# Altium PCB SoM BaseBoard Limbotics Prototype V0PcbDoc.PcbDoc
Units mm, origin at the board's own origin, x right, y up, seen from the top; angles counter-clockwise.
Board outline 85 x 56 mm, 2 copper layers (Top Layer, Bottom Layer); 82 components, 172 nets, 567 pads, 0 vias.
Unrouted connection lines stored in the file: 296.
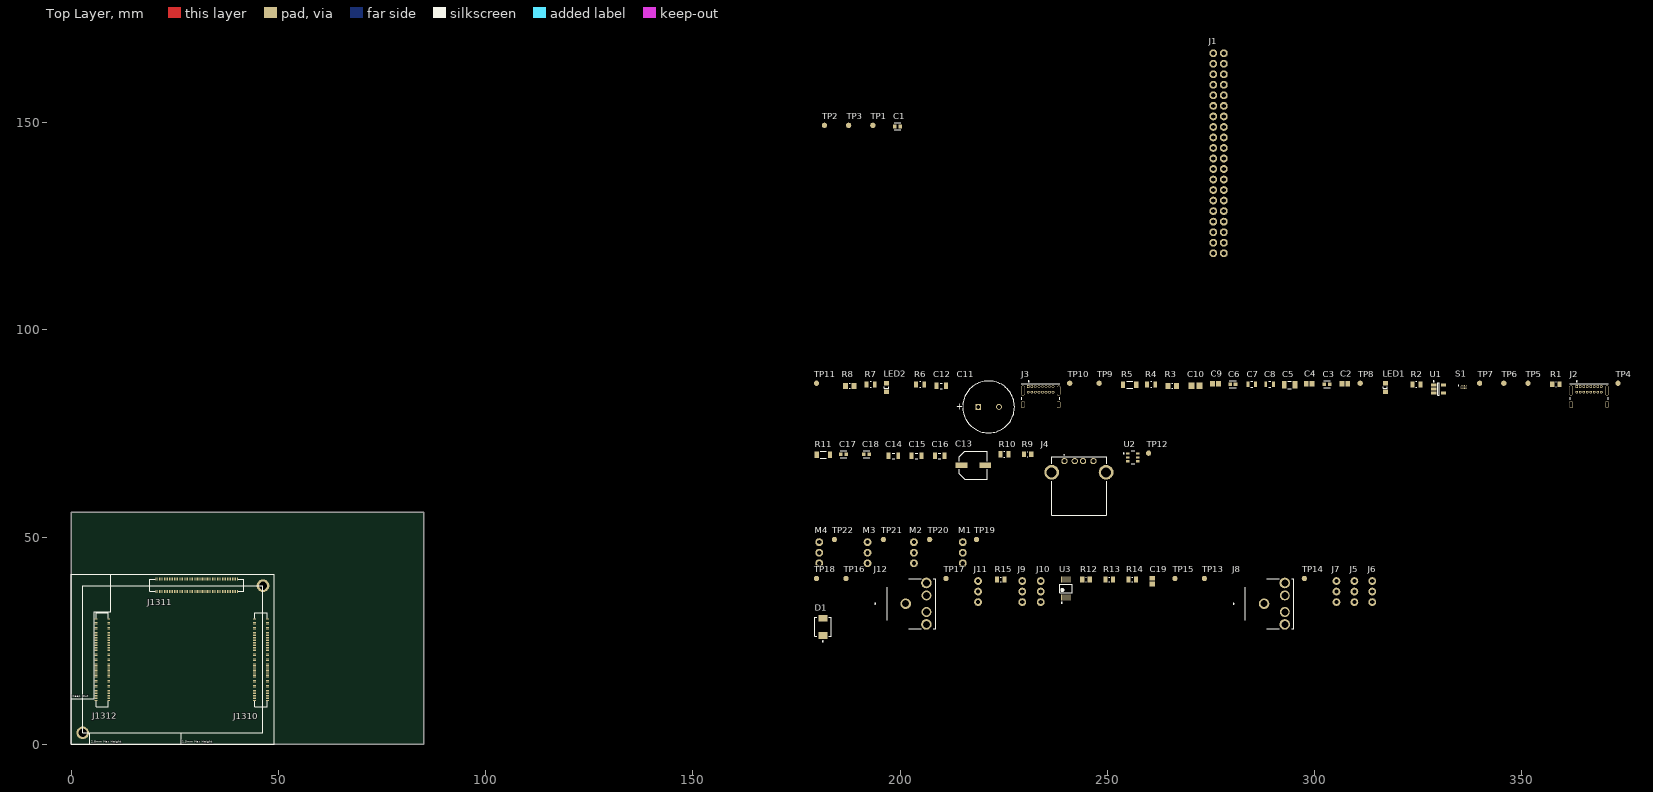
[diagram p0: Top Layer view]
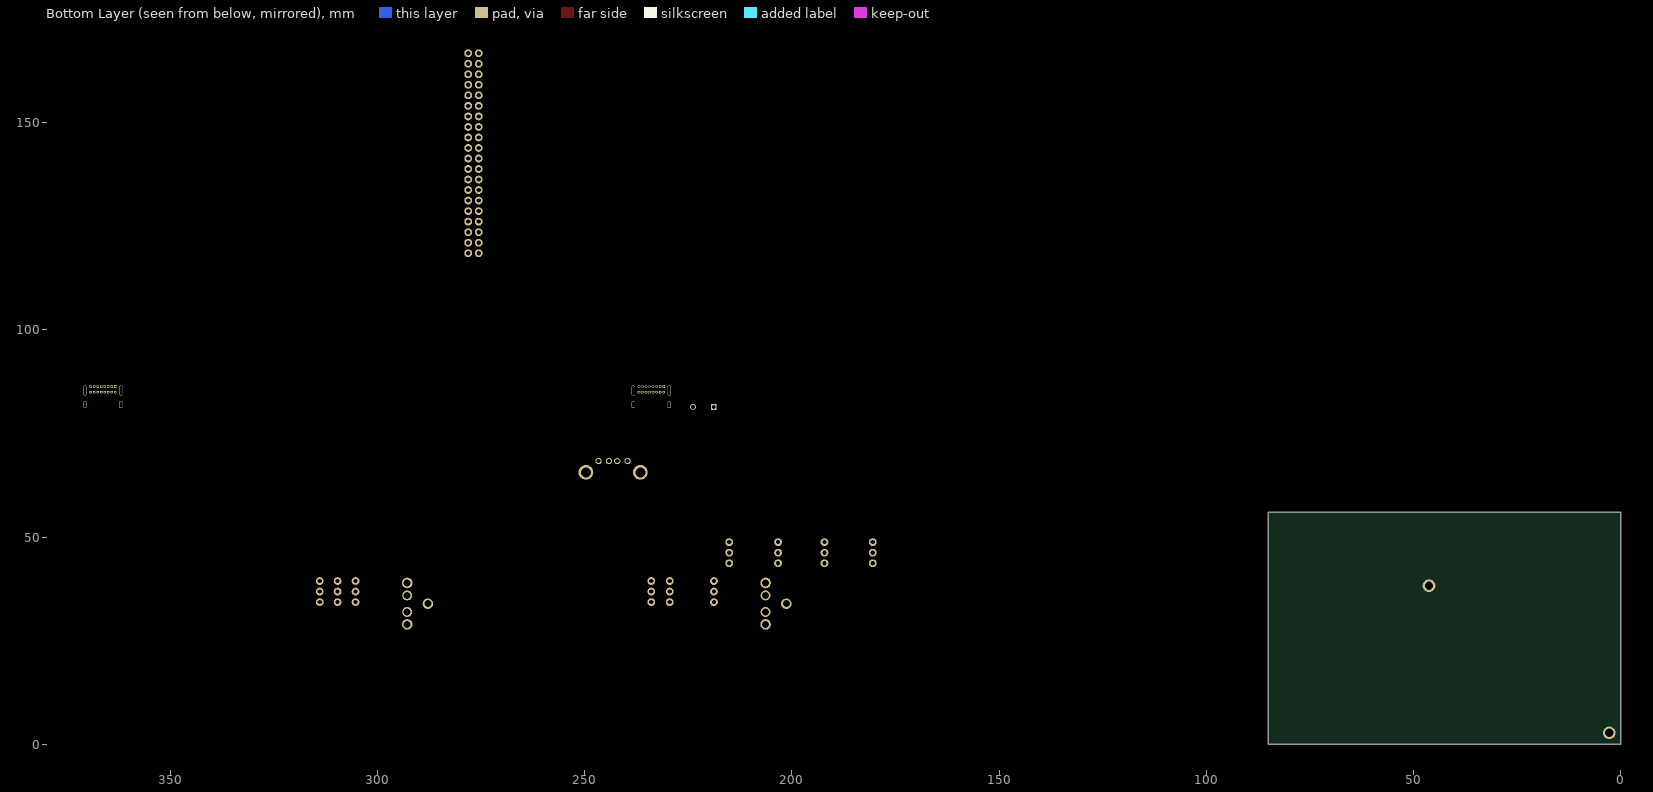
[diagram p1: Bottom Layer view, seen from below]

## Layer stack, top to bottom
Top Solder: solder mask 0.0102, Solder Resist, Dk 3.5
Top Layer: signal copper 0.0356
Dielectric 1: dielectric 0.32, FR-4, Dk 4.8
Bottom Layer: signal copper 0.0356
Bottom Solder: solder mask 0.0102, Solder Resist, Dk 3.5

## Board outline
0,0 85,0 85,56 0,56

## Design rules (kind name [scope] priority, off if disabled: settings)
Clearance [All] p1: gap=0.254 ignorepadtopadclearanceinfootprint=TRUE except(0: Arc-Hole Track-Hole SMDPad-Hole THPad-Hole Via-Hole Fill-Hole Poly-Hole Region-Hole Text-Hole; 0.2: Arc-Arc Arc-Track Track-Track)
PolygonConnect [All] p1: connectstyle=Relief reliefconductorwidth=0.254 reliefentries=4 polygonreliefangle="90 Angle" airgapwidth=0.254
RoutingVias [All] p1: holewidth=0.711 width=1.27 viastyle="Through Hole" minholewidth=0.711 minwidth=1.27 maxholewidth=0.711 maxwidth=1.27
SolderMaskExpansion [All] p1: expansion=0.102 istentingtop=FALSE
Width [All] p1: maxlimit=0.762 minlimit=0.127 preferedwidth=0.178
30 further rules are at their usual default settings.

## Classes and differential pairs
component class SoM: C1 J1 J1310 J1311 J1312 TP1 TP2 TP3
component class Power: C2 C3 C4 C5 C6 C7 C8 C9 C10 C11 C12 D1 J2 J3 LED1 LED2 R1 R2 R3 R4 R5 R6 R7 R8 S1 TP4 TP5 TP6 TP7 TP8 TP9 TP10 TP11 U1
component class "Peripherals - USB": C13 C14 C15 C16 C17 C18 J4 R9 R10 R11 TP12 U2
component class "Peripherals - Servos": M1 M2 M3 M4 TP19 TP20 TP21 TP22
component class "Peripherals - MyoSensor": C19 J5 J6 J7 J8 J9 J10 J11 J12 R12 R13 R14 R15 TP13 TP14 TP15 TP16 TP17 TP18 U3

## Components (designator, comment, footprint, x,y, rotation, side; value= is the part's Value field where it differs from the comment)
C1 "0.1uF" FP-C0603-CJ-MFG 199.39,149.098 r0 top value=100nF
C2 "1uF" CAPC2013X145X50LL20T25 307.34,86.995 r0 top
C3 "0.1uF" FP-C0603-CJ-MFG 303.022,86.868 r0 top value=100nF
C4 "1uF" CAPC2013X145X50LL20T25 298.704,86.995 r0 top
C5 "47uF" FP-GRM31C-0_2-e0_3_0_8-IPC_C 294.005,86.741 r0 top
C6 "0.1uF" FP-C0603-CJ-MFG 280.289,86.868 r0 top value=100nF
C7 "22uF" FP-GRM21B-0_15-MFG 284.861,86.868 r0 top
C8 "22uF" FP-GRM21B-0_15-MFG 289.179,86.868 r0 top
C9 "33nF" CAPC2013X94X50LL20T25 276.098,86.995 r0 top
C10 "2.2uF" CAPC2013X135X50ML10T20 271.272,86.487 r0 top
C11 "100uF * n" CAPPR65-500-2000X1250X2200 221.361,81.407 r0 top
C12 "10uF" CAPC2013X145X20ML20 209.931,86.487 r0 top
C13 "100uF" PNSC-EEEFK1C101P_L 217.678,67.31 r0 top
C14 "10uF" CAPC2013X145X20ML20 198.374,69.596 r0 top
C15 "10uF" CAPC2013X145X20ML20 203.962,69.596 r0 top
C16 "10uF" CAPC2013X145X20ML20 209.55,69.596 r0 top
C17 "0.1uF" FP-C0603-CJ-MFG 186.309,69.977 r0 top value=100nF
C18 "0.1uF" FP-C0603-CJ-MFG 191.897,69.977 r0 top value=100nF
C19 "1uF" CAPC2013X145X50LL20T25 260.858,39.37 r90 top
D1 "SMBJ5.0A-TR" FP-SMB-MFG 181.356,28.321 r90 top
J1 "210-P92-20GBEG" 2X20 278.13,118.491 r90 top
J2 "USB4085-GF-A" FP-USB4085-GF-A-MFG 366.268,82.296 r0 top
J3 "USB4085-GF-A" FP-USB4085-GF-A-MFG 233.934,82.296 r0 top
J4 "87520-0010BLF" 875200010BLF 239.649,68.326 r0 top
J5 "0.1 1x3 Header" 1X03 309.626,34.29 r90 top
J6 "0.1 1x3 Header" 1X03 313.944,34.29 r90 top
J7 "0.1 1x3 Header" 1X03 305.308,34.29 r90 top
J8 "SJ1-3523N" SJ13523N 283.337,33.909 r0 top
J9 "0.1 1x3 Header" 1X03 229.489,34.29 r90 top
J10 "0.1 1x3 Header" 1X03 233.934,34.29 r90 top
J11 "0.1 1x3 Header" 1X03 218.821,34.29 r90 top
J12 "SJ1-3523N" SJ13523N 196.85,33.909 r0 top
J1310 "DF40HC(3.0)-100DS-0.4V(51)" DF40HC30100DS04V51 45.78,20.39 r90 top
J1311 "DF40HC(3.0)-100DS-0.4V(51)" DF40HC30100DS04V51 30.25,38.37 r0 top
J1312 "DF40HC(3.0)-100DS-0.4V(51)" DF40HC30100DS04V51 7.48,20.39 r90 top
LED1 "redLED" 0805_A 317.119,86.106 r90 top
LED2 "greenLED" 0805_A 196.723,86.106 r90 top
M1 "Servo Motor" 1X03 215.138,43.688 r90 top
M2 "Servo Motor" 1X03 203.327,43.688 r90 top
M3 "Servo Motor" 1X03 192.151,43.688 r90 top
M4 "Servo Motor" 1X03 180.467,43.688 r90 top
R1 "10kR" RESC2013X60X35NL10T20 358.267,86.868 r0 top
R2 "5.1kR" FP-CRCW0805-e3-MFG 324.612,86.868 r0 top
R3 "10kR" RESC2013X60X35ML10T20 265.684,86.487 r0 top
R4 "5.1kR" FP-CRCW0805-e3-MFG 260.604,86.868 r0 top
R5 "DNP 0R" FP-RC1206-MFG 255.397,86.741 r0 top value=0Ω
R6 "5.1kR" FP-CRCW0805-e3-MFG 204.851,86.868 r0 top
R7 "5.1kR" FP-CRCW0805-e3-MFG 192.913,86.868 r0 top
R8 "10kR" RESC2013X60X35ML10T20 187.833,86.487 r0 top
R9 "10kR" RESC2013X60X35NL10T20 230.759,69.977 r0 top
R10 "20kR" FP-CRCW0805-e3-MFG 225.171,69.977 r0 top
R11 "DNP 0R" FP-RC1206-MFG 181.483,69.85 r0 top value=0Ω
R12 "10kR" RESC2013X60X35NL10T20 244.856,39.751 r0 top
R13 "10kR" RESC2013X60X35NL10T20 250.444,39.751 r0 top
R14 "10kR" RESC2013X60X35NL10T20 256.032,39.751 r0 top
R15 "10kR" RESC2013X60X35NL10T20 224.282,39.751 r0 top
S1 "KTS1681AEUZ-TR" KTS1681AEUZTR 335.407,86.614 r0 top
TP1 "TestPad" TestPad50mil 193.421,149.352 r90 top
TP2 "TestPad" TestPad50mil 181.737,149.352 r90 top
TP3 "TestPad" TestPad50mil 187.579,149.352 r90 top
TP4 "TestPad" TestPad50mil 373.253,87.122 r90 top
TP5 "TestPad" TestPad50mil 351.536,87.122 r90 top
TP6 "TestPad" TestPad50mil 345.694,87.122 r90 top
TP7 "TestPad" TestPad50mil 339.852,87.122 r90 top
TP8 "TestPad" TestPad50mil 311.023,87.122 r90 top
TP9 "TestPad" TestPad50mil 248.031,87.122 r90 top
TP10 "TestPad" TestPad50mil 240.919,87.122 r90 top
TP11 "TestPad" TestPad50mil 179.832,87.122 r90 top
TP12 "TestPad" TestPad50mil 259.969,70.231 r90 top
TP13 "TestPad" TestPad50mil 273.431,40.005 r90 top
TP14 "TestPad" TestPad50mil 297.561,40.005 r90 top
TP15 "TestPad" TestPad50mil 266.319,40.005 r90 top
TP16 "TestPad" TestPad50mil 186.944,40.005 r90 top
TP17 "TestPad" TestPad50mil 211.074,40.005 r90 top
TP18 "TestPad" TestPad50mil 179.832,40.005 r90 top
TP19 "TestPad" TestPad50mil 218.44,49.403 r90 top
TP20 "TestPad" TestPad50mil 207.137,49.403 r90 top
TP21 "TestPad" TestPad50mil 195.961,49.403 r90 top
TP22 "TestPad" TestPad50mil 184.15,49.403 r90 top
U1 "LDS3985M33R" SOT23-5L_M 329.946,85.725 r0 top
U2 "AP22653W6-7" FP-SOT26-MFG 256.159,69.215 r0 top
U3 "ADS1015IDGST" FP-DGS0010A-MFG 240.03,37.592 r90 top

## Footprints (in the part's own frame and the unit in brackets; to place one, negate y for a bottom-side part, rotate by r counter-clockwise, add the part's x,y. Pads: shape width x height; smd on the part's side, far side on the other; paste and mask are expansions set on the pad)
1X03 [mil]
  round 74 hole 40: 1(0,0) 2(100,0) 3(200,0)
2X20 [mil]
  round 74 hole 40: 1(0,0) 2(0,100) 3(100,0) 4(100,100) 5(200,0) 6(200,100) 7(300,0) 8(300,100) 9(400,0) 10(400,100) 11(500,0) 12(500,100) 13(600,0) 14(600,100) 15(700,0) 16(700,100) 17(800,0) 18(800,100) 19(900,0) 20(900,100) 21(1000,0) 22(1000,100) 23(1100,0) 24(1100,100) 25(1200,0) 26(1200,100) 27(1300,0) 28(1300,100) 29(1400,0) 30(1400,100) 31(1500,0) 32(1500,100) 33(1600,0) 34(1600,100) 35(1700,0) 36(1700,100) 37(1800,0) 38(1800,100) 39(1900,0) 40(1900,100)
0805_A [mm] "Chip LED, 2-Leads, Body 2.0x1.3mm, IPC Medium Density"
  rect 1.1x1.2 smd: 1(-1.05,0) 2(1.05,0)
  silkscreen extent -0.15,-0.5 0.15,0.5, body extent -1,-0.62 1,0.63, height 0.68
875200010BLF [mm]
  round 1.5 hole 1: 1(0,0) 2(2.5,0) 3(4.5,0) 4(7,0)
  round 3.57 hole 2.38: MH1(-3.07,-2.71) MH2(10.07,-2.71)
  silkscreen extent -3.05,-13.01 10.07,1.55, body extent -4.15,-13.01 11.16,0.99, height 7.9
CAPC2013X94X50LL20T25 [mm] "Chip Capacitor, 2-Leads, Body 2.01x1.25mm, IPC High Density"
  rect 1.15x1.35 smd: 1(-0.725,0) 2(0.725,0)
  body extent -1.1,-0.72 1.1,0.72, height 0.94
CAPC2013X135X50ML10T20 [mm] "Chip Capacitor, 2-Leads, Body 2.00x1.25mm, IPC Low Density"
  rect 1.4x1.5 smd: 1(-0.95,0) 2(0.95,0)
  body extent -1.05,-0.67 1.05,0.67, height 1.35
CAPC2013X145X20ML20 [mm] "Chip Capacitor, 2-Leads, Body 2.20x1.45mm, IPC Low Density"
  rect 0.95x1.55 smd: 1(-1.175,0) 2(1.175,0)
  silkscreen extent -0.3,-0.67 0.3,0.67, body extent -1.1,-0.72 1.1,0.72, height 1.45
CAPC2013X145X50LL20T25 [mm] "Chip Capacitor, 2-Leads, Body 2.00x1.25mm, IPC High Density"
  rect 1.1x1.35 smd: 1(-0.7,0) 2(0.7,0)
  body extent -1.1,-0.72 1.1,0.72, height 1.45
CAPPR65-500-2000X1250X2200 [mm] "THD, 2-Leads, Dia 12.5mm, Body Length 20mm"
  rect 1.4x1.4 hole 0.9: 1(-2.5,0)
  round 1.4 hole 0.9: 2(2.5,0)
  silkscreen extent -6.25,-6.25 6.25,6.25, body extent -6.25,-6.25 6.26,6.25, height 22.01
DF40HC30100DS04V51 [mm]
  rect 0.2x0.7 smd: 1(9.8,-1.54) 2(9.8,1.54) 3(9.4,-1.54) 4(9.4,1.54) 5(9,-1.54) 6(9,1.54) 7(8.6,-1.54) 8(8.6,1.54) 9(8.2,-1.54) 10(8.2,1.54) 11(7.8,-1.54) 12(7.8,1.54) 13(7.4,-1.54) 14(7.4,1.54) 15(7,-1.54) 16(7,1.54) 17(6.6,-1.54) 18(6.6,1.54) 19(6.2,-1.54) 20(6.2,1.54) 21(5.8,-1.54) 22(5.8,1.54) 23(5.4,-1.54) 24(5.4,1.54) 25(5,-1.54) 26(5,1.54) 27(4.6,-1.54) 28(4.6,1.54) 29(4.2,-1.54) 30(4.2,1.54) 31(3.8,-1.54) 32(3.8,1.54) 33(3.4,-1.54) 34(3.4,1.54) 35(3,-1.54) 36(3,1.54) 37(2.6,-1.54) 38(2.6,1.54) 39(2.2,-1.54) 40(2.2,1.54) 41(1.8,-1.54) 42(1.8,1.54) 43(1.4,-1.54) 44(1.4,1.54) 45(1,-1.54) 46(1,1.54) 47(0.6,-1.54) 48(0.6,1.54) 49(0.2,-1.54) 50(0.2,1.54) 51(-0.2,-1.54) 52(-0.2,1.54) 53(-0.6,-1.54) 54(-0.6,1.54) 55(-1,-1.54) 56(-1,1.54) 57(-1.4,-1.54) 58(-1.4,1.54) 59(-1.8,-1.54) 60(-1.8,1.54) 61(-2.2,-1.54) 62(-2.2,1.54) 63(-2.6,-1.54) 64(-2.6,1.54) 65(-3,-1.54) 66(-3,1.54) 67(-3.4,-1.54) 68(-3.4,1.54) 69(-3.8,-1.54) 70(-3.8,1.54) 71(-4.2,-1.54) 72(-4.2,1.54) 73(-4.6,-1.54) 74(-4.6,1.54) 75(-5,-1.54) 76(-5,1.54) 77(-5.4,-1.54) 78(-5.4,1.54) 79(-5.8,-1.54) 80(-5.8,1.54) 81(-6.2,-1.54) 82(-6.2,1.54) 83(-6.6,-1.54) 84(-6.6,1.54) 85(-7,-1.54) 86(-7,1.54) 87(-7.4,-1.54) 88(-7.4,1.54) 89(-7.8,-1.54) 90(-7.8,1.54) 91(-8.2,-1.54) 92(-8.2,1.54) 93(-8.6,-1.54) 94(-8.6,1.54) 95(-9,-1.54) 96(-9,1.54) 97(-9.4,-1.54) 98(-9.4,1.54) 99(-9.8,-1.54) 100(-9.8,1.54)
  silkscreen extent -11.3,-1.47 11.3,1.47, body extent -11.3,-1.87 11.3,1.87, height 3.15
FP-C0603-CJ-MFG [mm]
  rect 0.85x0.9 smd paste+0 mask+0: 1(-0.65,0) 2(0.65,0)
  silkscreen extent -0.8,-0.85 0.8,0.85, body extent -1.2,-0.6 1.2,0.6, height 0.25
FP-CRCW0805-e3-MFG [mm]
  rect 0.95x1.45 smd paste+0 mask+0: 1(-0.975,0) 2(0.975,0)
  silkscreen extent -0.13,-0.7 0.13,0.7, body extent -1.55,-0.82 1.55,0.82, height 0.25
FP-DGS0010A-MFG [mm]
  rrect33% 1.45x0.3 smd paste+0 mask+0: 1(-2.2,1) 2(-2.2,0.5) 3(-2.2,0) 4(-2.2,-0.5) 5(-2.2,-1) 6(2.2,-1) 7(2.2,-0.5) 8(2.2,0) 9(2.2,0.5) 10(2.2,1)
  silkscreen extent -3.6,-1.55 1.05,1.55, body extent -3.03,-1.8 3.03,1.8, height 0.25
FP-GRM21B-0_15-MFG [mm]
  rect 0.7x1.3 smd paste+0 mask+0: 1(-0.95,0) 2(0.95,0)
  silkscreen extent -0.23,-0.7 0.23,0.7, body extent -1.4,-0.8 1.4,0.8, height 0.25
FP-GRM31C-0_2-e0_3_0_8-IPC_C [mm]
  rect 1.155x1.706 smd paste+0 mask+0: 1(-1.276,0) 2(1.276,0)
  silkscreen extent -0.4,-0.9 0.4,0.9, body extent -1.95,-1 1.95,1, height 0.25
FP-RC1206-MFG [mm]
  rect 1x1.5 smd paste+0 mask+0: 1(-1.6,0) 2(1.6,0)
  silkscreen extent -0.72,-0.85 0.72,0.85, body extent -2.2,-0.95 2.2,0.95, height 0.25
FP-SMB-MFG [mm]
  rect 1.62x2.18 smd paste+0 mask+0: 1(-2.11,0) 2(2.11,0)
  silkscreen extent -3.65,-1.97 2.3,1.97, body extent -3.02,-2.07 3.02,2.07, height 0.25
FP-SOT26-MFG [mm]
  rect 0.8x0.55 smd paste+0 mask+0: 1(-1.2,0.95) 2(-1.2,0) 3(-1.2,-0.95) 4(1.2,-0.95) 5(1.2,0) 6(1.2,0.95)
  silkscreen extent -2.3,-1.55 0.43,1.55, body extent -1.7,-1.65 1.7,1.65, height 0.25
FP-USB4085-GF-A-MFG [mm]
  rrect100% 0.9x2.4 hole 2.1 slot 0.6 at 0 deg paste-1000 mask+0: 1(-4.325,3.045) 2(4.325,3.045)
  rrect100% 0.9x1.7 hole 1.4 slot 0.6 at 0 deg paste-1000 mask+0: 3(-4.325,-0.335) 4(4.325,-0.335)
  rect 0.65x0.65 hole 0.4 paste-1000 mask+0: A1(-2.975,4.025)
  round 0.65 hole 0.4 paste-1000 mask+0: A4(-2.125,4.025) A5(-1.275,4.025) A6(-0.425,4.025) A7(0.425,4.025) A8(1.275,4.025) A9(2.125,4.025) A12(2.975,4.025) B1(2.975,2.675) B4(2.125,2.675) B5(1.275,2.675) B6(0.425,2.675) B7(-0.425,2.675) B8(-1.275,2.675) B9(-2.125,2.675) B12(-2.975,2.675)
  silkscreen extent -4.57,0.89 4.57,5.39, body extent -4.87,-4.83 4.87,4.83, height 0.25
KTS1681AEUZTR [mm]
  round 0.225 smd: A1(0,0) A2(0.4,0) A3(0.8,0) A4(1.2,0) B1(0,-0.4) B2(0.4,-0.4) B3(0.8,-0.4) B4(1.2,-0.4) C1(0,-0.8) C2(0.4,-0.8) C3(0.8,-0.8) C4(1.2,-0.8)
  silkscreen extent -0.7,-0.05 -0.6,0.05, body extent -0.25,-1.01 1.45,0.21, height 0.76
PNSC-EEEFK1C101P_L [mm] "Aluminum Electrolytic Capacitor, Body 6.8x6.8mm, IPC High Density"
  rect 2.85x1.4 smd: 1(-2.85,0) 2(2.85,0)
  silkscreen extent -3.4,-3.4 3.4,3.4, body extent -3.9,-3.4 3.9,3.4, height 6.3
RESC2013X60X35ML10T20 [mm] "Chip Resistor, 2-Leads, Body 2.1x1.35mm, IPC Low Density"
  rect 1.2x1.45 smd: 1(-1,0) 2(1,0)
  silkscreen extent -0.1,-0.63 0.1,0.63, body extent -1.05,-0.68 1.05,0.67, height 0.6
RESC2013X60X35NL10T20 [mm] "Chip Resistor, 2-Leads, Body 2.1x1.35mm, IPC Medium Density"
  rect 1x1.35 smd: 1(-0.9,0) 2(0.9,0)
  silkscreen extent -0.1,-0.58 0.1,0.58, body extent -1.05,-0.68 1.05,0.67, height 0.6
SJ13523N [mm]
  round 2.55 hole 1.7: 1(4.5,0) 2(9.5,-5) 3(9.5,5)
  round 2.4 hole 1.7: 10(9.5,-2) 11(9.5,2)
  round 0.6 hole 1.2 unplated: MH1(2,5) MH2(4.5,5) MH3(9.5,0) MH4(2,-5) MH5(4.5,-5)
  silkscreen extent -2.95,-6 11.7,6, body extent 0,-6 11.7,6, height 5.6
SOT23-5L_M [mm] "SOT23, 5-Leads, Body 2.9x1.6mm, Pitch 0.95mm, Lead Span 2.8mm, IPC Low Density"
  rect 1.3x0.7 smd: 1(-1.2,0.95) 2(-1.2,0) 3(-1.2,-0.95) 4(1.2,-0.95) 5(1.2,0.95)
  silkscreen extent -1.32,-1.5 0.15,1.97, body extent -0.87,-1.5 0.87,1.5, height 1.45
TestPad50mil [mm]
  round 1.27 smd: 1(0,0)

## Part data
C1 C3 C6 C17 C18: library part CMP-2006-03300-2, "C0603X104K5RACTU CAP CER 0.1UF 50V X7R 0603", Capacitance=100nF, Manufacturer=Kemet, Manufacturer Part Number=C0603X104K5RACTU, Package=C0603-CJ, Temperature="-55°C to +125°C", Temperature Characteristic=X7R, Temperature Coefficient=15%, Temperature Range High=+125°C, Temperature Range Low=-55°C, Tolerance=10%, Voltage=50V, Automotive=No, Category=Cap, ComponentLink2Description=Datasheet, ComponentLink2URL=https://content.kemet.com/datasheets/KEM_C1013_X7R_FT-CAP_SMD.pdf, Device Class L1="Passive Components", Device Class L2=Capacitors, Device Class L3="Ceramic Capacitors", Digikey Description="CAP CER 0.1UF 50V X7R 0603", Height=0.95mm, Ipc Land Pattern Name=CAPC16080X80, Lead Free=Yes, Material=Ceramic, Mouser Description="Capacitor; Ceramic; Cap 0.1uF; Tol+10%; SMT; Flexible Termination; Vol-Rtg 50V; TR", Octopart=https://octopart.com/c0603x104k5ractu-kemet-9145062, RoHS=TRUE, Voltage Rating=50V
C2 C4 C19: library part CMP-1036-04746-2, "C0805C105K4PACTU", Manufacturer=Kemet, Part Number=C0805C105K4PACTU
C5: library part CMP-2000-06344-2, "GRM31CR60J476ME19L Chip Multilayer Ceramic Capacitors for General Purpose, 1206, 47uF, X5R, 15%, 20%, 6.3V", Case Code (Imperial)=1206, Case Code (Metric)=3216, Dielectric=X5R, Max Operating Temperature=85°C, Min Operating Temperature=-55°C, Package Quantity=2000, Tolerance=20%, Voltage=6.3V, Capacitance=47uF, Case/Package=1206, Depth=1.6mm, Height=1.6mm, Lead Free="Lead Free", Length=3.2mm, Material=Ceramic, Mount="Surface Mount", Packaging="Tape and Reel", Radiation Hardening=No, REACH SVHC="No SVHC", Termination=SMD/SMT, Thickness=0.071inch, Voltage Rating=6.3V, Voltage Rating (DC)=6.3V, Width=0.063inch
C7 C8: library part CMP-2007-03385-2, "GRM21BR60J226ME39L Chip Multilayer Ceramic Capacitors for General Purpose, 0805, 22uF, X5R, 15%, 20%, 6.3V", Case Code (Imperial)=0805, Case Code (Metric)=2012, Dielectric=X5R, Max Operating Temperature=85°C, Min Operating Temperature=-55°C, Package Quantity=1, Tolerance=20%, Voltage=6.3V, Capacitance=22uF, Case/Package=0805, Depth=1.25mm, Height=1.25mm, Lead Free="Lead Free", Length=2mm, Material=Ceramic, Mount="Surface Mount", Packaging="Tape and Reel", Radiation Hardening=No, REACH SVHC="No SVHC", Termination=SMD/SMT, Thickness=0.053inch, Voltage Rating=6.3V, Voltage Rating (DC)=6.3V, Width=0.049inch
C9: library part CMP-1036-04167-2, "08055C333JAT2A", Manufacturer="AVX Interconnect / Elco", Part Number=08055C333JAT2A
C10: library part CMP-2007-03455-1, "GRM21BR71C225KA12L", Manufacturer=Murata, Part Number=GRM21BR71C225KA12L
C11: library part CMP-1665-00014-4, "ECA-1JHG471 Aluminum Electrolytic Capacitor (Radial Lead Type), 470 uF, 63 V, -55 to 105 degC, 2-Pin THD, RoHS, Bulk", Manufacturer=Panasonic, Max Operating Temperature="105 degC", Min Operating Temperature="-55 degC", Package Quantity=200, Voltage Rating="63 V", ComponentLink1Description="Manufacturer URL", ComponentLink1URL=http://www.panasonic.com/, ComponentLink2Description=Datasheet, ComponentLink2URL=http://industrial.panasonic.com/cdbs/www-data/pdf/RDF0000/ABA0000C1038.pdf, DatasheetVersion=03/2016, Height="20 mm", Lead Pitch="5 mm", Length="20 mm", Mount="Through Hole", Mounting Technology="Through Hole", PackageDescription="2-Pin Through Hole Device, Dia 12.5 mm, Body Length 20 mm", PackageReference=Radial, Packaging=Bulk, Pins=2, REACH SVHC="No SVHC", RoHSCompliant=true
C12 C14 C15 C16: library part CMP-2000-05452-1, "C2012X7R1A106K125AC Multilayer Ceramic Chip Capacitor, 10 uF, +/- 10%, 10 V, -55 to 125 degC, 0805 (2012 Metric), RoHS, Tape and Reel", Capacitance=10µF, Manufacturer=TDK, Operating Temperature=-55degC~125degC, Package / Case=0805(2012Metric), Package Description="2-Pin Surface Mount Device, Body 2 x 1.25 mm", Package Reference=805, PCN Part Number=MLCCPartNumberChange30/Nov/2012, Ratings=-, Standard Package=1, Temperature Coefficient=X7R, Tolerance=±10%, Voltage - Rated=10V, Applications=GeneralPurpose, Category=Capacitors, Datasheet URL=http://download.siliconexpert.com/pdfs/2015/4/21/15/54/45/779/tdk_/manual/37024850441143360mlcc_commercial_general_en.pdf, Datasheet Version=Mar-15, Family=CeramicCapacitors, Features=-, Height - Seated (Max)=-, Lead Spacing=-, Lead Style=-, Manufacturer URL=http://www.tdk.com/, Mounting Type=SurfaceMount,MLCC, Online Catalog=CSeries,GeneralPurpose, Other Names=445-6857-6, Packaging=Digi-Reel, Product Training Modules=CSeriesGeneralApplicationsSEAT,CCV,andTVCLDesignToolsGuidetoReplacinganElectrolyticCapacitorwithanMLCC, RoHS Information=RoHSCertificate-MLCC, Series=C, Size / Dimension="0.079\"Lx0.049\"W(2.00mmx1.25mm)", Thickness (Max)="0.057\"(1.45mm)"
C13: library part CMP-2000-06203-1, "EEEFK1C101P Aluminum Electrolytic Capacitor, 100 uF, 20%, 16 V, -55 to 105 degC, 2-Pin SMD, RoHS, Tape and Reel", Capacitance=100µF, Case Size/Dimension=Ø6.3x5.8mm, Lifetime@Temperature=2000Hrs@105°C, Manufacturer=Panasonic, Operating Temp Range=-55to+105°C, Operating Temp-Max=105°C, Package Description="2-Pin Surface Mount Device, Body 6.6 x 6.6 mm", Package Reference=EEEFK1C101P, Rated Voltage=16V, Ripple Current=240mA, Datasheet URL=http://datasheet.octopart.com/EEEFK1C101P-Panasonic-datasheet-13266987.pdf, Datasheet Version=11/2012, Impedance=0.36O, Manufacturer URL=http://www.panasonic.com/, Mounting Technology=SurfaceMount, Series=FK, Type=Can
D1: library part CMP-12225-000019-1, "TVS DIODE 5V 13.4V SMB", Breakdown Voltage=6.4V, Clamping Voltage=14.4V, Manufacturer=STMicroelectronics, Max Junction Temp=+150°C, Package=SMB, Peak Pulse Current=275A, Peak Pulse Power=600W, Reverse Standoff Voltage=5V, Temperature="-55°C to +150°C", Temperature Range Low=-55°C, Automotive=No, Category=Diode, ComponentLink2Description=Datasheet, ComponentLink2URL=https://www.st.com/resource/en/datasheet/smbj.pdf, Device Class L1="Circuit Protection", Device Class L2="TVS Diodes", Device Class L3=unset, Digikey Description="TVS DIODE 5V 13.4V SMB", Direction=Unidirectional, Height=2.65mm, Lead Free=Yes, Manufacturer Part Number=SMBJ5.0A-TR, Mouser Description="SMBJ Series 600 W 5 V Uni Directional SMT TVS Diode - DO-214AA", Number of Channels=1, Octopart=https://octopart.com/smbj5.0a-tr-stmicroelectronics-347079, RoHS=TRUE, Standoff Height=0.05mm, Temperature Range High=+150°C
J1: library part CONN_HEADER_20x2_SMT, "SOCKET 2X20 100-MIL STRAIGHT SMT", Function Code=DOK, MPN=210-P92-20GBEG, QCI MPN=210-P92-20GBEG, QCI Supplier=PRX, QPN=DFHD20MS161, QPN Description="CONN DIP HEADER 20P 2R MS(P2.54,H8.3)", Supplier 1=Samtec, Supplier Part Number 1=210-P92-20GBEG
J2 J3: library part CMP-196119-000001-1, "CONN RCPT USB2.0 TYPEC 16POS", Current Rating=4.25A, Manufacturer="Global Connector Technology", Package=0, Temperature="-40°C to +85°C", Temperature Range High=+85°C, Temperature Range Low=-40°C, Voltage Rating=20V, Automotive=No, Category=Conn, ComponentLink2Description=Datasheet, ComponentLink2URL=https://gct.co/files/drawings/usb4085.pdf, Conn Orientation="Right Angle", Contact Material=Gold,Nickel, Device Class L1=Connectors, Device Class L2="USB Connectors", Device Class L3=unset, Digikey Description="CONN RCPT USB2.0 TYPEC 16POS", Height=3.66mm, Is Female=yes, Lead Free=Yes, Manufacturer Part Number=USB4085-GF-A, Number of Contacts=16, Octopart=https://octopart.com/usb4085-gf-a-global+connector+technology-94773699, Pitch=0.85mm, RoHS=TRUE, Shielding=true, Usb Standard="USB 2.0"
J5 J6 J7 J9 J10 J11: library part CONN_03, Package=1X03, DeviceSetName=CONN_03, GateName_1=J$1, LibraryName=SparkFun-Connectors, PROD_ID=XXX-00000, SymbolName_1=CONN_03
J8 J12: "Connector", Manufacturer_Name="CUI Inc.", Mouser Part Number=490-SJ1-3523N, Arrow Part Number=SJ1-3523N, Arrow Price/Stock=https://www.arrow.com/en/products/sj1-3523n/cui-devices, Datasheet Link=https://componentsearchengine.com/Datasheets/1/SJ1-3523N.pdf, Height=5.5mm, Manufacturer_Part_Number=SJ1-3523N, Mouser Price/Stock=https://www.mouser.co.uk/ProductDetail/CUI-Devices/SJ1-3523N?qs=WyjlAZoYn50aNl0vAhb3Tg%3D%3D
J1310 J1311 J1312: library part CONN_HIROSE-DF40C-100DP-0.4V(51), "CONN HDR 100POS 0.4MM SMD GOLD", Supplier Part Number 1=H11614CT-ND, Function Code=DOK, MPN=DF40HC(3.0)-100DS-0.4V(51), QCI MPN=DF40HC(3.0)-100DS-0.4V(51), QCI Supplier=HRS, QPN=DFHSA0FR017, QPN Description="CONN HOUSING 100P 2R FR(P0.4,H2.9)", Supplier 1=Digi-Key
LED1: library part CMP-1426-00010-1, "SMD mono-color Chip LED, WL-SMCW, Super Red", Color="Super Red", Manufacturer="Wuerth Elektronik", PartNumber=150080SS75000, ComponentLink1Description="Manufacturer URL", ComponentLink1URL=http://www.we-online.com, ComponentLink2Description=Datasheet, ComponentLink2URL=http://katalog.we-online.com/led/datasheet/150080SS75000.pdf, PackageReference=0805_A
LED2: library part CMP-1426-00007-1, "SMD mono-color Chip LED, WL-SMCW, Green", Color=Green, Manufacturer="Wuerth Elektronik", PartNumber=150080GS75000, ComponentLink1Description="Manufacturer URL", ComponentLink1URL=http://www.we-online.com, ComponentLink2Description=Datasheet, ComponentLink2URL=http://katalog.we-online.com/led/datasheet/150080GS75000.pdf, PackageReference=0805_A
M1 M2 M3 M4: library part SERVO, Package=1X03, DeviceSetName=SERVO, GateName_1=G$1, LibraryName=SparkFun-Electromechanical, SymbolName_1=SMALL_SERVO_MOTOR
R1 R9 R12 R13 R14 R15: library part CMP-1659-00013-4, "RC0805FR-0710KL Chip Resistor, 10 KOhm, +/- 1%, 0.125 W, -55 to 155 degC, 0805 (2012 Metric), RoHS, Tape and Reel", Manufacturer=Yageo, Max Operating Temperature="155 degC", Min Operating Temperature="-55 degC", Package Quantity=5000, Voltage Rating="150 V", ComponentLink1Description="Manufacturer URL", ComponentLink1URL=http://www.yageo.com/, ComponentLink2Description=Datasheet, ComponentLink2URL=http://www.yageo.com/documents/recent/PYu-RC_Group_51_RoHS_L_04.pdf, DatasheetVersion="Rev. 4, 02/2016", Height="0.5 mm", Length="2 mm", Mount="Surface Mount", Mounting Technology="Surface Mount", PackageDescription="2-Pin Surface Mounted Device, Body 2 x 1.25 mm", PackageReference=0805, Packaging="Tape and Reel", Pins=2, REACH SVHC="No SVHC", RoHSCompliant=true
R2 R4 R6 R7: library part CMP-2001-04024-2, "RES Thick Film, 5.1kΩ, 1%, 0.125W, 100ppm/°C, 0805 CRCW08055K10FKEA", Case Code (Imperial)=0805, Case Code (Metric)=2012, Max Operating Temperature=155°C, Max Power Dissipation=125mW, Min Operating Temperature=-55°C, Package Quantity=10, Temperature Coefficient=100ppm/°C, Tolerance=1%, Voltage Rating=150V, Case/Package=0805, Composition="Thick Film", Contact Plating=Tin, Depth=1.25mm, Features="Automotive AEC-Q200", Height=0.45mm, Lead Free="Lead Free", Length=2mm, Military Standard=Not, Mount="Surface Mount", Number of Terminations=2, Packaging="Tape and Reel", Power Rating=125mW, Radiation Hardening=No, Resistance=5.1kR, Termination=SMD/SMT, Voltage Rating (DC)=150V, Weight=0.000194oz, Width=0.049inch
R3 R8: library part CMP-2100-03671-1, "RC0805FR-071KL Chip Resistor, 1 KOhm, +/- 1%, 125 mW, -55 to 155 degC, 0805 (2012 Metric), RoHS, Tape and Reel", Case Code (Imperial)=0805, Case Code (Metric)=2012, Manufacturer=Yageo, Max Operating Temperature=155degC, Max Power Dissipation=125mW, Min Operating Temperature=-55degC, Package Description="2-Pin Surface Mounted Device, Body 2 x 1.25 mm", Package Quantity=1, Resistance=1KOhm, Temperature Coefficient=100ppm/degreesC, Tolerance=1%, Voltage Rating=150V, Case/Package=0805, Composition=ThickFilm, Datasheet URL=http://www.yageo.com/NewPortal/yageodocoutput?fileName=/pdf/R-Chip/PYu-RC_Group_51_RoHS_L_5.pdf, Datasheet Version="Rev. 5, 10/2016", Depth=1.25mm, Height=0.024inch, Lead Free=LeadFree, Length=0.079inch, Manufacturer URL=http://www.yageo.com/, Military Standard=Not, Number of Pins=2, Number of Terminations=2, Package Reference=0805, Packaging=TapeandReel, Power Rating=125mW, REACH SVHC=Unknown, RoHSCompliant=true, Termination=SMD/SMT, Voltage Rating (DC)=150V, Width=0.049inch
R5 R11: library part CMP-2100-03681-2, "RC1206JR-070RL RES SMD 0 OHM JUMPER 1/4W 1206", Manufacturer=YAGEO, Manufacturer Part Number=RC1206JR-070RL, Package=RC1206, Power Rating=0.25W, Resistance=0Ω, Temperature="-55°C to +155°C", Temperature Coefficient=300ppm/°C, Temperature Range High=+155°C, Temperature Range Low=-55°C, Tolerance=5%, Voltage Rating=200V, Automotive=No, Category=Res, ComponentLink2Description=Datasheet, ComponentLink2URL=https://www.yageo.com/upload/media/product/productsearch/datasheet/rchip/PYu-RC_Group_51_RoHS_L_10.pdf, Composition="Thick Film", Device Class L1="Passive Components", Device Class L2=Resistors, Device Class L3="Chip SMD Resistors", Digikey Description="RES SMD 0 OHM JUMPER 1/4W 1206", Footprint Url=https://www.yageo.com/upload/website/yageo_PYu-R_Mount_10_19050818_343.pdf, Height=0.65mm, Ipc Land Pattern Name=RESC310160X55, Lead Free=Yes, Mouser Description="Resistor: thick film; SMD; 1206; 0O; 0.25W; ±5%; -55÷155°C", Octopart=https://octopart.com/rc1206jr-070rl-yageo-40025601, RoHS=TRUE, Series=RC
R10: library part CMP-2001-03667-2, "RES Thick Film, 20kΩ, 1%, 0.125W, 100ppm/°C, 0805", Case Code (Imperial)=0805, Case Code (Metric)=2012, Max Operating Temperature=155°C, Max Power Dissipation=125mW, Min Operating Temperature=-55°C, Package Quantity=10, Temperature Coefficient=100ppm/°C, Tolerance=1%, Voltage Rating=150V, Case/Package=0805, Composition="Thick Film", Contact Plating=Tin, Depth=1.25mm, Features="Automotive AEC-Q200", Height=0.45mm, Lead Free="Lead Free", Length=2mm, Military Standard=Not, Mount="Surface Mount", Number of Pins=2, Number of Terminations=2, Packaging="Tape and Reel", Power Rating=125mW, Resistance=20kR, Termination=SMD/SMT, Voltage Rating (DC)=150V, Weight=0.000194oz, Width=1.25mm, Working Voltage=150V
S1: "Switch", Manufacturer_Name="Kinetic Technologies", Height=0.665mm, Manufacturer_Part_Number=KTS1681AEUZ-TR
U1: library part CMP-0244-00363-1, "Ultra Low Drop Low Noise BiCMOS 300 mA Voltage Regulator for use with Very Low ESR Output Capacitor, 3.3V, 5-Pin SOT-23, Tape and Reel", ComponentLink1Description="Manufacturer URL", ComponentLink1URL=http://www.st.com, ComponentLink2Description=Datasheet, ComponentLink2URL=http://www.st.com/internet/com/TECHNICAL_RESOURCES/TECHNICAL_LITERATURE/DATASHEET/CD00047465.pdf, DatasheetVersion=1/07/2010, PackageDescription="5-Pin SOT-23 Package, 2.9 x 1.6 mm Body, 0.95 mm Pitch, 2.8 mm Lead Span", PackageReference=SOT23-5L, PackageVersion=1/01/2008
U2: library part CMP-12749-000002-1, "LOAD SWITCH,SOT26,T&R,3K"
U3: library part CMP-0003-00377-3, "IC ADC 12BIT SIGMA-DELTA 10VSSOP", Case/Package=VSSOP, Max Operating Temperature=125°C, Max Power Dissipation=900uW, Max Supply Voltage=5.5V, Min Operating Temperature=-40°C, Min Supply Voltage=2V, Nominal Supply Current=150uA, Operating Supply Voltage=3.3V, Package Quantity=250, Contact Plating=Gold, Conversion Rate=3300S/s, Height=1.02mm, Integral Nonlinearity (INL)=0.5LSB, Interface=I2C, Lead Free="Lead Free", Length=3mm, Max Supply Voltage (DC)=5.5V, Min Supply Voltage (DC)=2V, Number of A/D Converters=1, Number of Bits=12, Number of Channels=4, Number of Converters=1, Number of Elements=1, Number of Inputs=4, Number of Pins=10, Packaging="Tape and Reel", Polarity=Bipolar, Power Dissipation=900uW, Radiation Hardening=No, REACH SVHC="No SVHC", Resolution=12b, Sampling Rate=3.3KS/s, Supply Type=Single, Termination=SMD/SMT, Width=3mm

## Free pads (board coordinates)
  round 3.048 hole 2.032: A(2.75,2.75) A(46.25,38.25)

## Nets (pads, with @x,y where several pads share a name; then routed paths per layer and width w, separated by ;. In a path a pad name is that pad's centre, name@x,y a point inside that pad or via, vN(x,y) a via of type N, cw(c..) or ccw(c..) an arc to the next point about the centre after c; other vN are vias at no path point)
3V3: C10.2 C19.2 J1.1 J1.17 J6.3 J10.3 R12.2 R13.2 R14.2 TP7.1 U1.5 U3.8
5VSYS: C2.2 C6.1 C7.1 C8.1 C14.2 C17.1 D1.1 J1.2 J1.4 J1312.93 J1312.94 J1312.95 J1312.96 J1312.97 J1312.98 J1312.99 J1312.100 R5.2 R9.2 R11.1 S1.A2 S1.A3 S1.B2 TP6.1 U1.1 U1.3 U2.1 U2.3
DCDC_3V3: J1310.84 J1310.86 J1310.88 J1310.90 TP1.1
ECSPI1_MISO: J1.21 J1312.5
ECSPI1_MOSI: J1.19 J1312.7
ECSPI1_SCLK: J1.23 J1312.4
ECSPI1_SS0: J1.24 J1312.8
ECSPI1_SS1: J1.26 J1310.6
ECSPI2_MISO: J1.22 J1312.3
ECSPI2_SCLK: J1.18 J1312.2
ECSPI2_SS0: J1.36 J1312.1
GND: C1.2 C2.1 C3.2 C4.1 C5.2 C6.2 C7.2 C8.2 C9.1 C10.1 C11.2 C12.1 C13.2 C14.1 C15.1 C16.1 C17.2 C18.2 C19.1 D1.2 J1.6 J1.9 J1.14 J1.20 J1.25 J1.30 J1.34 J1.39 J2.A1 J2.A12 J2.B1 J2.B12 J3.A1 J3.A12 J3.B1 J3.B12 J4.4 J6.2 J10.2 J1310.1 J1310.2 J1310.7 J1310.25 J1310.39 J1310.40 J1310.42 J1310.44 J1310.46 J1310.50 J1310.56 J1310.62 J1310.63 J1310.64 J1310.65 J1310.66 J1310.67 J1310.68 J1310.69 J1310.70 J1310.71 J1310.72 J1310.73 J1310.74 J1310.75 J1310.76 J1310.77 J1310.78 J1310.80 J1311.1 J1311.2 J1311.7 J1311.8 J1311.13 J1311.14 J1311.19 J1311.20 J1311.25 J1311.26 J1311.31 J1311.32 J1311.37 J1311.38 J1311.43 J1311.44 J1311.49 J1311.50 J1311.55 J1311.56 J1311.61 J1311.62 J1311.67 J1311.68 J1311.73 J1311.74 J1311.79 J1311.80 J1311.86 J1311.89 J1311.90 J1311.94 J1311.99 J1311.100 J1312.9 J1312.10 J1312.65 J1312.66 J1312.71 J1312.72 J1312.77 J1312.78 J1312.83 J1312.84 M1.3 M2.3 M3.3 M4.3 pad.A R1.2 R3.1 R4.1 R7.1 R8.1 R10.1 R15.1 S1.A4 S1.B4 S1.C1 S1.C4 TP9.1 TP11.1 U1.2 U2.2 U3.3
GPIO6: J1.13 J1312.49 R9.1 U2.4
GPIO7: J1.29 J1312.45
GPIO8: J1.31 J1312.47
I2C2_SCL: J1.5 J1311.87 R13.1 U3.10
I2C2_SDA: J1.3 J1311.85 R14.1 U3.9
I2C3_SCL: J1.28 J1311.83
I2C3_SDA: J1.27 J1311.81
MYO_END: J7.2 J8.3 J11.2 J12.3 TP14.1 TP17.1
MYO_GND: J5.1 J9.1
MYO_MID: J7.3 J8.1 J11.3 J12.1 TP13.1 TP16.1
MYO_RAW: J5.3 J9.3
MYO_REF: J7.1 J8.2 J11.1 J12.2 TP15.1 TP18.1
MYO_SHIELD: J5.2 J9.2
NAND_DATA03: J1.16 J1310.22
NAND_DATA07: J1.37 J1310.18
NetC9_2: C9.2 U1.4
NetJ2_A5: J2.A5 R2.2
NetJ2_B5: J2.B5 R4.2
NetJ3_A5: J3.A5 R6.2
NetJ3_B5: J3.B5 R7.2
NetJ4_2: J4.2 J1311.65
NetJ4_3: J4.3 J1311.63
NetJ6_1: J6.1 U3.4
NetJ10_1: J10.1 U3.5
NetJ1310_4: J1310.4
NetJ1310_9: J1310.9
NetJ1310_10: J1310.10
NetJ1310_11: J1310.11
NetJ1310_12: J1310.12
NetJ1310_13: J1310.13
NetJ1310_15: J1310.15
NetJ1310_16: J1310.16
NetJ1310_17: J1310.17
NetJ1310_19: J1310.19
NetJ1310_20: J1310.20
NetJ1310_21: J1310.21
NetJ1310_23: J1310.23
NetJ1310_24: J1310.24
NetJ1310_26: J1310.26
NetJ1310_27: J1310.27
NetJ1310_28: J1310.28
NetJ1310_29: J1310.29
NetJ1310_31: J1310.31
NetJ1310_32: J1310.32
NetJ1310_33: J1310.33
NetJ1310_34: J1310.34
NetJ1310_35: J1310.35
NetJ1310_36: J1310.36
NetJ1310_37: J1310.37
NetJ1310_38: J1310.38
NetJ1310_48: J1310.48
NetJ1310_58: J1310.58
NetJ1310_60: J1310.60
NetJ1310_79: J1310.79
NetJ1311_4: J1311.4
NetJ1311_6: J1311.6
NetJ1311_10: J1311.10
NetJ1311_12: J1311.12
NetJ1311_16: J1311.16
NetJ1311_18: J1311.18
NetJ1311_21: J1311.21
NetJ1311_23: J1311.23
NetJ1311_27: J1311.27
NetJ1311_29: J1311.29
NetJ1311_40: J1311.40
NetJ1311_42: J1311.42
NetJ1311_45: J1311.45
NetJ1311_46: J1311.46
NetJ1311_47: J1311.47
NetJ1311_48: J1311.48
NetJ1311_51: J1311.51
NetJ1311_52: J1311.52
NetJ1311_53: J1311.53
NetJ1311_54: J1311.54
NetJ1311_57: J1311.57
NetJ1311_58: J1311.58
NetJ1311_59: J1311.59
NetJ1311_60: J1311.60
NetJ1311_64: J1311.64
NetJ1311_66: J1311.66
NetJ1311_69: J1311.69
NetJ1311_70: J1311.70
NetJ1311_71: J1311.71
NetJ1311_72: J1311.72
NetJ1311_75: J1311.75 J1311.77
NetJ1311_76: J1311.76
NetJ1311_82: J1311.82 J1311.84
NetJ1311_98: J1311.98
NetJ1312_12: J1312.12
NetJ1312_14: J1312.14
NetJ1312_16: J1312.16
NetJ1312_18: J1312.18
NetJ1312_20: J1312.20
NetJ1312_22: J1312.22
NetJ1312_24: J1312.24
NetJ1312_28: J1312.28
NetJ1312_30: J1312.30
NetJ1312_32: J1312.32
NetJ1312_34: J1312.34
NetJ1312_38: J1312.38
NetJ1312_39: J1312.39
NetJ1312_43: J1312.43
NetJ1312_48: J1312.48
NetJ1312_50: J1312.50
NetJ1312_51: J1312.51
NetJ1312_52: J1312.52
NetJ1312_53: J1312.53
NetJ1312_54: J1312.54
NetJ1312_55: J1312.55
NetJ1312_56: J1312.56
NetJ1312_57: J1312.57
NetJ1312_58: J1312.58
NetJ1312_59: J1312.59
NetJ1312_60: J1312.60
NetJ1312_61: J1312.61
NetJ1312_62: J1312.62
NetJ1312_63: J1312.63
NetJ1312_64: J1312.64
NetJ1312_68: J1312.68
NetJ1312_70: J1312.70
NetJ1312_73: J1312.73
NetJ1312_74: J1312.74
NetJ1312_75: J1312.75
NetJ1312_76: J1312.76
NetJ1312_79: J1312.79
NetJ1312_80: J1312.80
NetJ1312_81: J1312.81
NetJ1312_82: J1312.82
NetJ1312_85: J1312.85
NetJ1312_86: J1312.86
NetJ1312_87: J1312.87
NetJ1312_89: J1312.89
NetJ1312_91: J1312.91
NetLED1_1: LED1.1 R3.2
NetLED2_1: LED2.1 R8.2
NetR1_1: R1.1 S1.A1 TP4.1
NetR10_2: R10.2 U2.5
NetR12_1: R12.1 U3.2
NetR15_2: R15.2 U3.1
NetS1_B1: S1.B1 TP8.1
NetU3_6: U3.6
NetU3_7: U3.7
NVCC_ENET_2V5: C1.1 J1310.83 J1310.85 J1310.87
PWM1: J1.32 J1312.88 M1.1 TP19.1
PWM2: J1.33 J1312.90 M2.1 TP20.1
PWM3: J1.15 J1312.92 M3.1 TP21.1
PWM4: J1312.11 M4.1 TP22.1
SAI1_RXD0: J1.38 J1312.33
SAI1_TXC: J1.12 J1312.40
SAI1_TXD0: J1.40 J1312.44
SAI1_TXFS: J1.35 J1312.46
UART1_RXD: J1.10 J1311.95
UART1_TXD: J1.8 J1311.93
UART3_RXD: J1.11 J1311.97
UART3_TXD: J1.7 J1311.91
USB_5V_Servos: C11.1 C12.2 J3.A4 J3.A9 J3.B4 J3.B9 LED2.2 M1.2 M2.2 M3.2 M4.2 TP10.1
USB_5V_SoM: C3.1 C4.2 C5.1 J2.A4 J2.A9 J2.B4 J2.B9 LED1.2 R5.1 S1.B3 S1.C2 S1.C3 TP5.1
VDD_3V3: J1310.94 J1310.96 J1310.98 J1310.100 TP2.1
VDDA_1V8: J1310.91 J1310.93 J1310.95 J1310.97 J1310.99 TP3.1
VUSB: C13.1 C15.2 C16.2 C18.1 J4.1 R11.2 TP12.1 U2.6
pads on no net: J2.1 J2.2 J2.3 J2.4 J2.A6 J2.A7 J2.A8 J2.B6 J2.B7 J2.B8 J3.1 J3.2 J3.3 J3.4 J3.A6 J3.A7 J3.A8 J3.B6 J3.B7 J3.B8 J4.MH1 J4.MH2 J8.10 J8.11 J8.MH1 J8.MH2 J8.MH3 J8.MH4 J8.MH5 J12.10 J12.11 J12.MH1 J12.MH2 J12.MH3 J12.MH4 J12.MH5 J1310.3 J1310.5 J1310.8 J1310.14 J1310.30 J1310.41 J1310.43 J1310.45 J1310.47 J1310.49 J1310.51 J1310.52 J1310.53 J1310.54 J1310.55 J1310.57 J1310.59 J1310.61 J1310.81 J1310.82 J1310.89 J1310.92 J1311.3 J1311.5 J1311.9 J1311.11 J1311.15 J1311.17 J1311.22 J1311.24 J1311.28 J1311.30 J1311.33 J1311.34 J1311.35 J1311.36 J1311.39 J1311.41 J1311.78 J1311.88 J1311.92 J1311.96 J1312.6 J1312.13 J1312.15 J1312.17 J1312.19 J1312.21 J1312.23 J1312.25 J1312.26 J1312.27 J1312.29 J1312.31 J1312.35 J1312.36 J1312.37 J1312.41 J1312.42 J1312.67 J1312.69 R2.1 R6.1

## Silkscreen, mask and mechanical layers (free items; w line width, h text height)
Top Overlay:
  lines w0.1: 0,11 5.5,11 5.5,32 9.5,32 9.5,41 ; 0,0 49,0 49,41 0,41 0,0
  lines w0.127: 4.5,0 4.5,2.75 ; 26.5,0 26.5,2.75
  lines w0.203: 2.75,2.75 46.25,2.75 46.25,38.25 2.75,38.25 2.75,2.75
  text "Keep  Out" at 0.279,11.371 h0.51
  text "2.8mm Max Height" at 4.851,0.322 h0.51
  text "1.5mm Max Height" at 26.822,0.322 h0.51

## Text inside footprints (layer, text, board x,y; h text height)
C11: Top Overlay "+" at 213.561,80.657 h1.5